# Altium PCB walle-eye-stereo.PcbDoc (part 2 of 2)
Units mil, origin at the board's own origin, x right, y up, seen from the top; angles counter-clockwise.
Board outline 1865.45 x 699.12 mil, 4 copper layers (Top Layer, SIG1, SIG2, Bottom Layer), stack 23.756 mil thick; 36 components, 55 nets, 245 pads, 155 vias.
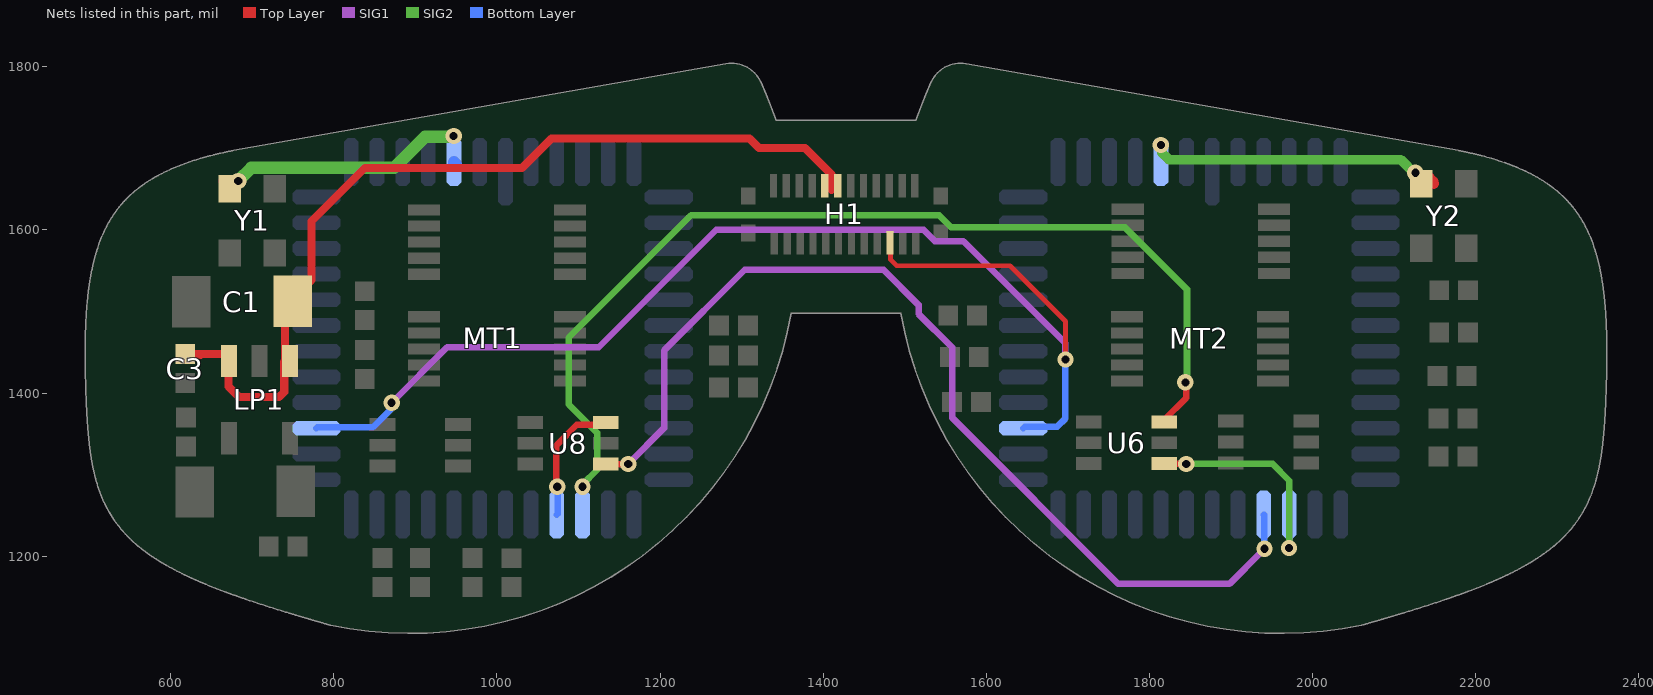
[diagram p4: the nets of this part, all layers, seen from the top]

## Via types
v1: diameter 20, hole 10, Top Layer to Bottom Layer, 110 vias
v2: diameter 18, hole 8, Top Layer to Bottom Layer, 45 vias

## Nets (pads, with @x,y where several pads share a name; then routed paths per layer and width w, separated by ;. In a path a pad name is that pad's centre, name@x,y a point inside that pad or via, vN(x,y) a via of type N, cw(c..) or ccw(c..) an arc to the next point about the centre after c; other vN are vias at no path point) (continued)
STB: H1.10 MT1.33 MT2.33 | length 1529.1
  Top Layer w6: H1.10@1482.39,1578 1482.66,1577.72 1482.66,1563.34 1490.04,1555.96 1629.04,1555.96 1697,1488 v1(1697,1441)
  SIG1 w8: v1(871,1388) 939,1456 1125,1456 1269,1600 1523,1600 1537,1586 1572,1586 1697,1461 v1(1697,1441)
  Bottom Layer w8: MT1.33@778.73,1356.76 779.97,1358 848,1358 869,1379 v1@869,1381 ; MT2.33@1645.23,1356.76 1647.04,1358.58 1686.76,1358.58 1697,1368.82 v1(1697,1441)
STLN_OUT0: MT1.22 U8.6 | length 160.9
  Top Layer w8: v1@1073,1288 1073,1289 1073,1336 1098,1361 U8.6@1133.52,1361
  Bottom Layer w8: MT1.22@1073.47,1251 1074.77,1252.3 v1@1074.77,1292.53
  other v1: 1074,1285
STLN_OUT1: MT2.22 U8.4 | length 1238.5
  Top Layer w8: U8.4@1133.52,1309.82 U8.4@1133.7,1310 ; U8.4@1133.52,1312.82 1133.61,1312.91 1160.09,1312.91 v1@1161,1312
  SIG1 w8: v1(1161,1313) 1205,1357 1205,1452 1304,1551 1474.02,1551 1517,1508.02 1517,1497 1558,1456 1558,1369.87 1761.87,1166 1898,1166 1938,1206 v1@1942,1206
  Bottom Layer w8: MT2.22@1939.97,1251 1940.48,1250.48 v1@1940.48,1209
  other v1: 1941,1209
VIN_5V: C1.1 C3.2 H1.19 H1.20 LP1.1 LP1.3 | length 1132.3
  Top Layer w10: C3.2@613,1447 613.27,1446.73 636.54,1446.73 636.54,1447 ; C3.2@618,1447.72 666.54,1447.72 669,1445.26 LP1.3@669,1445 ; LP1.3@671,1424 671,1408 684,1395 733,1395 739.38,1401.38 739.38,1438.27 740.18,1439.07 740.18,1497.82 C1.1@734,1504 ; C1.1@736.53,1512.55 C1.1@741.98,1518 ; 1410,1649 1411,1650 1411,1667 1377.78,1700.22 1321.38,1700.22 1309.6,1712 1067,1712 1031,1676 838,1676 772.55,1610.55 772.55,1538.55 752,1518 C1.1@751.85,1518 ; C1.1@741.98,1518 C1.1@751.85,1518 ; C1.1@741.98,1518 742.98,1519 742.98,1526.87 C1.1@751.85,1518
VSYNC0: MT1.21 U6.6 | length 1239.3
  Top Layer w8: U6.6@1818.26,1364.59 1818.26,1367.26 1845,1394 v1@1845,1413
  SIG2 w8: v1@1105,1288 1123,1306 1123,1351 1088,1386 1088,1468 1238,1618 1542,1618 1557,1603 1770,1603 1846,1527 v1@1846,1412 ; v1@1839,1413 v1(1844,1413)
  other v1: 1105,1285
VSYNC1: MT2.21 U6.4 | length 282.4
  Top Layer w8: U6.4@1823,1314 1823.8,1313.2 1844.8,1313.2 v1(1845,1313)
  SIG2 w8: v1@1849,1315 1849,1314.54 1850.54,1313 1950.99,1313 1971.46,1292.53 1971.46,1210.54 v1@1973,1209
  Bottom Layer w8: MT2.21@1971.46,1251 1971.23,1250.77 1971.23,1209.77 v1@1973,1208
  other v1: 1971,1210
XCLK0: MT1.47 Y1.3 | length 304.4
  Top Layer w15: Y1.3@666.07,1660 v1(683,1660)
  SIG2 w15: v1@684,1661 699,1676 874,1676 912,1714 v1@946,1714
  Bottom Layer w15: MT1.47@947.49,1683 MT1.47@950,1680.49
  other v1: 947,1715
XCLK1: MT2.47 Y2.3 | length 363.2
  Top Layer w12: Y2.3@2125,1671 2127.16,1671 2131.06,1667.1 2140.66,1667.1 2148.44,1659.32 2148.44,1656.37 2149,1656.93
  SIG2 w12: v1(1814,1704) 1815.78,1702.22 v1@1815.78,1695.78 ; v1@1815,1695 1824,1686 2108,1686 v1@2126,1668
  other v1: 2126,1670
pads on no net: H1. MT1.2 MT1.3 MT1.4 MT1.5 MT1.27 MT1.36 MT1.37 MT1.44 MT1.45 MT2.2 MT2.3 MT2.4 MT2.5 MT2.27 MT2.36 MT2.37 MT2.44 MT2.45 Y1.1 Y2.1

## Polygon pours and split planes (outlines as drawn)
GND-SEN on Top Layer "Top Layer-GND-SEN" (solid, remove dead copper, pour order 0): 422,1906 443,1885 2416,1885 2416,1027 2406,1017 2389,1034 395,1034
no net on Top Layer "Top Layer-No Net" (solid, pour order 2): 703,885
GND-SEN on Bottom Layer "Bottom Layer-GND-SEN" (solid, remove dead copper, pour order 4): 422,1876 2417,1876 2437,1856 2425,1844 2425,1039 426,1039 422,1043

## Keep-outs
Keep-Out Layer:
  circle w5: c2313.8,1458.67 r23.62
  circle w5: c542.15,1458.67 r23.62
  lines w5: 495.27,1441.79 495.28,1440.93 495.29,1440.07 495.29,1439.21 495.3,1438.35 495.31,1437.5 495.32,1436.64 495.33,1435.78 495.34,1434.92 495.35,1434.07 495.36,1433.21 495.37,1432.35 495.38,1431.49 495.4,1430.63 495.41,1429.78 495.42,1428.92 495.44,1428.06 495.45,1427.2 495.47,1426.34 495.49,1425.49 495.5,1424.63 495.52,1423.77 495.54,1422.91 495.55,1422.06 495.57,1421.2 495.59,1420.34 495.65,1417.77 495.69,1416.05 495.74,1414.34 495.78,1412.62 495.83,1410.9 495.9,1408.33 495.98,1405.76 496.06,1403.19 496.15,1400.61 496.24,1398.04 496.34,1395.47 496.44,1392.9 496.51,1391.18 496.55,1390.33 496.58,1389.47 496.62,1388.61 496.66,1387.75 496.69,1386.9 496.73,1386.04 496.77,1385.18 496.81,1384.33 496.85,1383.47 496.89,1382.61 496.93,1381.76 496.98,1380.9 497.02,1380.04 497.06,1379.18 497.11,1378.33 497.15,1377.47 497.2,1376.61 497.24,1375.76 497.29,1374.9 497.34,1374.04 497.39,1373.19 497.44,1372.33 497.49,1371.47 497.54,1370.62 497.59,1369.76 497.65,1368.91 497.7,1368.05 497.76,1367.19 497.81,1366.34 497.87,1365.48 497.93,1364.62 497.99,1363.77 498.05,1362.91 498.11,1362.06 498.17,1361.2 498.23,1360.35 498.3,1359.49 498.36,1358.63 498.43,1357.78 498.5,1356.92 498.56,1356.07 498.63,1355.21 498.71,1354.36 498.78,1353.5 498.85,1352.65 498.93,1351.79 499,1350.94 499.08,1350.08 499.16,1349.23 499.23,1348.37 499.32,1347.52 499.4,1346.67 499.48,1345.81 499.57,1344.96 499.65,1344.1 499.74,1343.25 499.83,1342.4 499.92,1341.54 500.01,1340.69 500.1,1339.84 500.2,1338.99 500.29,1338.13 500.39,1337.28 500.49,1336.43 500.59,1335.58 500.69,1334.72 500.79,1333.87 500.9,1333.02 501,1332.17 501.11,1331.32 501.22,1330.47 501.34,1329.62 501.45,1328.76 501.57,1327.91 501.68,1327.06 501.8,1326.21 501.93,1325.37 502.05,1324.52 502.18,1323.67 502.3,1322.82 502.43,1321.97 502.57,1321.12 502.7,1320.28 502.84,1319.43 502.98,1318.58 503.12,1317.74 503.27,1316.89 503.41,1316.04 503.56,1315.2 503.71,1314.35 503.87,1313.51 504.03,1312.67 504.19,1311.82 504.35,1310.98 504.51,1310.14 504.68,1309.3 504.85,1308.46 505.03,1307.61 505.2,1306.77 505.38,1305.93 505.57,1305.1 505.75,1304.26 505.94,1303.42 506.13,1302.58 506.33,1301.75 506.53,1300.91 506.73,1300.08 506.93,1299.24 507.14,1298.41 507.35,1297.58 507.56,1296.75 507.78,1295.92 508,1295.09 508.22,1294.26 508.45,1293.43 508.91,1291.78 509.39,1290.13 509.88,1288.48 510.39,1286.84 510.91,1285.2 511.45,1283.57 512,1281.94 512.56,1280.32 513.14,1278.71 513.74,1277.1 514.35,1275.49 514.98,1273.89 515.63,1272.3 516.29,1270.72 516.97,1269.14 517.66,1267.57 518.38,1266.01 519.11,1264.45 519.86,1262.91 ccw(c652.42,1327.98) 530.2,1245.09 ccw(c651.5,1327.36) 536.28,1236.77 537.89,1234.76 539.54,1232.77 541.22,1230.82 542.93,1228.89 544.67,1226.99 546.44,1225.12 548.24,1223.28 550.08,1221.46 551.94,1219.68 553.19,1218.51 554.46,1217.35 555.74,1216.2 557.03,1215.07 557.67,1214.51 558.33,1213.95 558.98,1213.39 559.64,1212.84 560.3,1212.29 560.96,1211.74 561.62,1211.2 562.29,1210.66 562.96,1210.12 563.63,1209.58 564.3,1209.05 564.98,1208.52 565.66,1208 566.34,1207.47 567.02,1206.95 567.71,1206.44 568.39,1205.92 569.08,1205.41 569.77,1204.9 570.47,1204.39 571.16,1203.89 571.86,1203.39 573.26,1202.39 574.67,1201.41 576.08,1200.43 577.5,1199.47 578.93,1198.52 580.36,1197.57 581.08,1197.1 581.8,1196.64 582.52,1196.18 583.25,1195.71 583.97,1195.26 584.7,1194.8 585.43,1194.34 586.16,1193.89 586.89,1193.44 587.62,1193 588.36,1192.55 589.09,1192.11 589.83,1191.67 590.57,1191.23 591.31,1190.79 592.05,1190.36 592.79,1189.93 593.53,1189.5 594.27,1189.07 595.02,1188.64 595.77,1188.22 597.26,1187.38 598.76,1186.54 600.27,1185.72 601.78,1184.9 603.29,1184.09 604.8,1183.28 606.33,1182.49 607.85,1181.7 609.38,1180.92 610.91,1180.14 612.45,1179.37 613.98,1178.61 614.75,1178.23 615.53,1177.86 616.3,1177.48 617.07,1177.11 617.84,1176.74 618.62,1176.37 619.39,1176 620.17,1175.63 620.95,1175.26 621.73,1174.9 622.5,1174.54 623.28,1174.18 624.06,1173.82 624.84,1173.46 625.62,1173.1 626.41,1172.75 627.19,1172.39 627.97,1172.04 628.75,1171.69 629.54,1171.34 630.32,1170.99 631.11,1170.64 631.9,1170.3 632.68,1169.95 633.47,1169.61 634.26,1169.27 635.05,1168.93 635.83,1168.59 636.62,1168.25 637.41,1167.91 638.2,1167.58 639,1167.24 639.79,1166.91 640.58,1166.58 641.37,1166.25 642.16,1165.92 642.96,1165.59 643.75,1165.26 645.34,1164.61 646.93,1163.96 648.52,1163.31 650.11,1162.67 651.71,1162.04 653.3,1161.41 654.9,1160.78 656.5,1160.15 658.1,1159.53 659.7,1158.92 661.3,1158.3 662.91,1157.69 664.51,1157.09 666.12,1156.49 666.92,1156.19 667.73,1155.89 668.53,1155.59 669.34,1155.29 670.14,1154.99 670.95,1154.7 671.75,1154.4 672.56,1154.11 673.37,1153.82 674.17,1153.52 674.98,1153.23 675.79,1152.94 676.59,1152.65 677.4,1152.36 678.21,1152.07 679.02,1151.78 679.83,1151.49 680.63,1151.21 681.44,1150.92 682.25,1150.63 683.06,1150.35 683.87,1150.06 684.68,1149.78 685.49,1149.5 686.3,1149.22 687.11,1148.93 687.92,1148.65 688.73,1148.37 689.54,1148.09 690.35,1147.81 691.17,1147.53 691.98,1147.26 692.79,1146.98 693.6,1146.7 695.23,1146.15 696.85,1145.6 698.48,1145.05 700.1,1144.51 701.73,1143.96 703.36,1143.42 704.99,1142.88 706.62,1142.34 708.25,1141.81 709.88,1141.27 711.51,1140.74 713.14,1140.21 714.78,1139.69 716.41,1139.16 718.04,1138.63 719.68,1138.11 721.31,1137.59 722.95,1137.07 724.59,1136.56 726.22,1136.04 727.86,1135.53 729.5,1135.02 731.14,1134.51 732.78,1134 734.41,1133.49 736.05,1132.98 737.69,1132.48 739.34,1131.98 740.98,1131.48 742.62,1130.98 744.26,1130.48 745.08,1130.23 745.9,1129.98 746.72,1129.73 747.55,1129.49 748.37,1129.24 749.19,1128.99 750.01,1128.74 750.83,1128.5 751.65,1128.25 752.48,1128.01 753.3,1127.76 754.12,1127.52 754.94,1127.27 755.77,1127.03 756.59,1126.78 757.41,1126.54 758.23,1126.29 759.06,1126.05 759.88,1125.81 760.7,1125.56 761.52,1125.32 762.35,1125.08 763.17,1124.84 763.99,1124.59 764.82,1124.35 765.64,1124.11 766.46,1123.87 767.29,1123.63 768.11,1123.39 768.93,1123.15 769.76,1122.9 770.58,1122.66 771.4,1122.42 772.23,1122.18 773.05,1121.94 773.87,1121.7 774.7,1121.46 775.52,1121.22 776.35,1120.98 777.17,1120.74 777.99,1120.51 778.82,1120.27 779.64,1120.03 780.47,1119.79 781.29,1119.55 782.11,1119.31 782.94,1119.07 783.76,1118.83 784.59,1118.6 785.41,1118.36 786.23,1118.12 787.06,1117.88 787.88,1117.64 788.71,1117.4 789.53,1117.17 790.36,1116.93 791.18,1116.69 792,1116.45 792.83,1116.21 793.65,1115.98 794.48,1115.74 795.3,1115.5 796.13,1115.26 ccw(c893.14,1580.21) 1360.93,1498.04 1495.02,1498.04 ccw(c1962.82,1580.21) 2059.83,1115.26 2061.48,1115.74 2062.3,1115.98 2063.12,1116.21 2063.95,1116.45 2064.77,1116.69 2065.6,1116.93 2066.42,1117.17 2067.25,1117.4 2068.07,1117.64 2068.89,1117.88 2069.72,1118.12 2070.54,1118.36 2071.37,1118.59 2072.19,1118.83 2073.01,1119.07 2073.84,1119.31 2074.66,1119.55 2075.49,1119.79 2076.31,1120.03 2077.13,1120.27 2077.96,1120.5 2078.78,1120.74 2079.6,1120.98 2080.43,1121.22 2081.25,1121.46 2082.08,1121.7 2082.9,1121.94 2083.72,1122.18 2084.55,1122.42 2085.37,1122.66 2086.19,1122.9 2087.02,1123.14 2087.84,1123.38 2088.66,1123.63 2089.49,1123.87 2090.31,1124.11 2091.13,1124.35 2091.96,1124.59 2092.78,1124.83 2093.6,1125.08 2094.42,1125.32 2095.25,1125.56 2096.07,1125.81 2096.89,1126.05 2097.71,1126.29 2098.54,1126.54 2099.36,1126.78 2100.18,1127.02 2101,1127.27 2101.83,1127.51 2102.65,1127.76 2103.47,1128 2104.29,1128.25 2105.11,1128.5 2105.93,1128.74 2106.76,1128.99 2107.58,1129.24 2108.4,1129.48 2109.22,1129.73 2110.04,1129.98 2110.86,1130.23 2111.68,1130.48 2112.51,1130.72 2114.15,1131.22 2115.79,1131.72 2117.43,1132.22 2119.07,1132.73 2120.71,1133.23 2122.35,1133.74 2123.99,1134.25 2125.62,1134.76 2127.26,1135.27 2128.9,1135.78 2130.54,1136.29 2132.17,1136.81 2133.81,1137.33 2135.44,1137.85 2137.08,1138.37 2138.71,1138.89 2140.35,1139.42 2141.98,1139.94 2143.61,1140.47 2145.24,1141 2146.87,1141.54 2148.5,1142.07 2150.13,1142.61 2151.76,1143.14 2153.39,1143.69 2155.02,1144.23 2156.65,1144.77 2158.27,1145.32 2159.9,1145.87 2161.52,1146.42 2163.15,1146.97 2163.96,1147.25 2164.77,1147.53 2165.58,1147.81 2166.39,1148.09 2167.2,1148.37 2168.01,1148.65 2168.82,1148.93 2169.63,1149.21 2170.44,1149.49 2171.25,1149.77 2172.06,1150.06 2172.87,1150.34 2173.68,1150.63 2174.49,1150.91 2175.3,1151.2 2176.11,1151.49 2176.92,1151.77 2177.72,1152.06 2178.53,1152.35 2179.34,1152.64 2180.15,1152.93 2180.95,1153.22 2181.76,1153.51 2182.57,1153.81 2183.37,1154.1 2184.18,1154.39 2184.98,1154.69 2185.79,1154.99 2186.59,1155.28 2187.4,1155.58 2188.2,1155.88 2189.01,1156.18 2189.81,1156.48 2190.61,1156.78 2191.42,1157.08 2193.02,1157.69 2194.63,1158.3 2196.23,1158.91 2197.83,1159.52 2199.43,1160.14 2201.03,1160.77 2202.63,1161.4 2204.22,1162.03 2205.82,1162.66 2207.41,1163.3 2209,1163.95 2210.59,1164.6 2212.18,1165.25 2212.97,1165.58 2213.76,1165.9 2214.56,1166.23 2215.35,1166.57 2216.14,1166.9 2216.93,1167.23 2217.72,1167.57 2218.51,1167.9 2219.3,1168.24 2220.09,1168.58 2220.88,1168.92 2221.67,1169.26 2222.46,1169.6 2223.24,1169.94 2224.03,1170.29 2224.82,1170.63 2225.6,1170.98 2226.39,1171.33 2227.17,1171.68 2227.95,1172.03 2228.74,1172.38 2229.52,1172.73 2230.3,1173.09 2231.08,1173.45 2231.86,1173.8 2232.64,1174.16 2233.42,1174.52 2234.2,1174.89 2234.98,1175.25 2235.75,1175.62 2236.53,1175.98 2237.3,1176.35 2238.08,1176.72 2238.85,1177.09 2239.62,1177.47 2240.4,1177.84 2241.17,1178.22 2241.94,1178.6 2242.71,1178.98 2244.24,1179.74 2245.78,1180.51 2247.31,1181.29 2248.83,1182.07 2250.36,1182.87 2251.87,1183.67 2253.39,1184.47 2254.9,1185.29 2256.41,1186.11 2257.91,1186.94 2259.41,1187.78 2260.9,1188.62 2261.64,1189.05 2262.39,1189.48 2263.13,1189.91 2263.87,1190.34 2264.61,1190.77 2265.35,1191.21 2266.09,1191.65 2266.83,1192.09 2267.56,1192.53 2268.3,1192.97 2269.03,1193.42 2269.76,1193.87 2270.49,1194.32 2271.22,1194.78 2271.94,1195.23 2272.67,1195.69 2273.39,1196.15 2274.12,1196.62 2274.84,1197.08 2275.56,1197.55 2276.27,1198.02 2277.7,1198.97 2279.13,1199.93 2280.55,1200.89 2281.96,1201.87 2283.36,1202.86 2284.76,1203.86 2285.45,1204.37 2286.14,1204.87 2286.83,1205.38 2287.52,1205.89 2288.21,1206.41 2288.9,1206.93 2289.58,1207.45 2290.26,1207.97 2290.94,1208.49 2291.61,1209.02 2292.29,1209.56 2292.96,1210.09 2293.63,1210.63 2294.3,1211.17 2294.96,1211.71 2295.62,1212.26 2296.28,1212.81 2296.94,1213.36 2297.59,1213.92 2298.24,1214.47 2298.89,1215.04 2299.54,1215.6 2300.82,1216.74 2302.1,1217.89 2303.36,1219.06 2304.61,1220.24 2306.46,1222.03 2308.28,1223.85 2310.07,1225.7 2311.83,1227.58 2313.57,1229.49 2315.27,1231.43 2316.93,1233.39 2318.57,1235.38 2320.17,1237.4 ccw(c2204.05,1327.67) 2321.73,1239.45 ccw(c2204,1327.69) 2330.77,1253.03 ccw(c2203.53,1327.98) 2336.45,1263.62 2337.19,1265.17 2337.91,1266.73 2338.62,1268.3 2339.3,1269.87 2339.97,1271.45 2340.63,1273.04 2341.27,1274.64 2341.89,1276.24 2342.5,1277.85 2343.09,1279.47 2343.66,1281.09 2344.22,1282.72 2344.76,1284.35 2345.29,1285.99 2345.81,1287.63 2346.31,1289.28 2346.8,1290.93 2347.03,1291.76 2347.27,1292.59 2347.5,1293.42 2347.73,1294.25 2347.95,1295.09 2348.17,1295.92 2348.39,1296.75 2348.61,1297.59 2348.82,1298.42 2349.03,1299.26 2349.23,1300.1 2349.43,1300.93 2349.63,1301.77 2349.83,1302.61 2350.02,1303.45 2350.21,1304.29 2350.39,1305.13 2350.58,1305.98 2350.76,1306.82 2350.94,1307.66 2351.11,1308.5 2351.28,1309.35 2351.45,1310.19 2351.62,1311.04 2351.78,1311.88 2351.94,1312.73 2352.1,1313.57 2352.25,1314.42 2352.4,1315.26 2352.55,1316.11 2352.7,1316.95 2352.85,1317.8 2352.99,1318.65 2353.13,1319.5 2353.26,1320.34 2353.4,1321.19 2353.53,1322.04 2353.66,1322.89 2353.79,1323.73 2353.92,1324.58 2354.04,1325.43 2354.16,1326.28 2354.28,1327.13 2354.4,1327.98 2354.51,1328.83 2354.63,1329.68 2354.74,1330.53 2354.85,1331.38 2354.96,1332.23 2355.06,1333.08 2355.17,1333.93 2355.27,1334.78 2355.37,1335.63 2355.47,1336.48 2355.57,1337.34 2355.67,1338.19 2355.76,1339.04 2355.86,1339.89 2355.95,1340.75 2356.04,1341.6 2356.13,1342.45 2356.22,1343.3 2356.31,1344.16 2356.39,1345.01 2356.48,1345.86 2356.56,1346.72 2356.64,1347.57 2356.72,1348.43 2356.8,1349.28 2356.88,1350.13 2356.96,1350.99 2357.03,1351.84 2357.11,1352.7 2357.18,1353.55 2357.25,1354.41 2357.32,1355.26 2357.39,1356.12 2357.46,1356.97 2357.53,1357.83 2357.6,1358.69 2357.66,1359.54 2357.72,1360.4 2357.79,1361.25 2357.85,1362.11 2357.91,1362.96 2357.97,1363.82 2358.03,1364.68 2358.09,1365.53 2358.14,1366.39 2358.2,1367.24 2358.26,1368.1 2358.31,1368.96 2358.36,1369.81 2358.42,1370.67 2358.47,1371.53 2358.52,1372.38 2358.57,1373.24 2358.62,1374.09 2358.67,1374.95 2358.71,1375.81 2358.76,1376.66 2358.81,1377.52 2358.85,1378.38 2358.89,1379.23 2358.94,1380.09 2358.98,1380.95 2359.02,1381.8 2359.07,1382.66 2359.11,1383.52 2359.15,1384.37 2359.19,1385.23 2359.22,1386.09 2359.26,1386.95 2359.3,1387.8 2359.34,1388.66 2359.37,1389.52 2359.41,1390.37 2359.45,1391.23 2359.55,1393.8 2359.65,1396.37 2359.74,1398.94 2359.83,1401.52 2359.92,1404.09 2360,1406.66 2360.08,1409.23 2360.15,1411.81 2360.2,1413.52 2360.24,1415.24 2360.28,1416.95 2360.32,1418.67 2360.38,1421.24 2360.4,1422.1 2360.42,1422.95 2360.44,1423.81 2360.45,1424.67 2360.47,1425.53 2360.49,1426.38 2360.5,1427.24 2360.52,1428.1 2360.53,1428.96 2360.54,1429.82 2360.56,1430.67 2360.57,1431.53 2360.58,1432.39 2360.6,1433.25 2360.61,1434.1 2360.62,1434.96 2360.63,1435.82 2360.64,1436.68 2360.65,1437.54 2360.65,1438.39 2360.66,1439.25 2360.67,1440.11 2360.68,1440.97 2360.68,1441.82 2360.69,1442.68 2360.69,1443.54 2360.7,1444.4 2360.7,1445.26 2360.7,1446.11 2360.7,1446.97 2360.7,1447.83 2360.7,1448.69 2360.7,1449.54 2360.7,1450.4 2360.7,1451.26 2360.7,1452.12 2360.7,1452.98 2360.69,1453.83 2360.69,1454.69 2360.68,1455.55 2360.68,1456.41 2360.67,1457.27 2360.66,1458.12 2360.65,1458.98 2360.64,1459.84 2360.63,1460.7 2360.61,1462.41 2360.58,1464.13 2360.55,1465.84 2360.52,1467.56 2360.48,1469.28 2360.44,1470.99 2360.4,1472.71 2360.35,1474.42 2360.32,1475.28 2360.3,1476.14 2360.27,1477 2360.24,1477.85 2360.21,1478.71 2360.18,1479.57 2360.15,1480.43 2360.12,1481.29 2360.08,1482.14 2360.05,1483 2360.01,1483.86 2359.98,1484.72 2359.94,1485.57 2359.9,1486.43 2359.86,1487.29 2359.82,1488.15 2359.77,1489 2359.73,1489.86 2359.68,1490.72 2359.64,1491.57 2359.59,1492.43 2359.54,1493.29 2359.49,1494.14 2359.44,1495 2359.39,1495.86 2359.33,1496.71 2359.28,1497.57 2359.22,1498.43 2359.16,1499.28 2359.1,1500.14 2359.04,1501 2358.98,1501.85 2358.91,1502.71 2358.85,1503.56 2358.78,1504.42 2358.64,1506.13 2358.5,1507.84 2358.35,1509.55 2358.19,1511.26 2358.03,1512.97 2357.86,1514.67 2357.68,1516.38 2357.5,1518.09 2357.31,1519.79 2357.12,1521.5 2356.91,1523.2 2356.7,1524.9 2356.49,1526.61 2356.26,1528.31 2356.14,1529.16 2356.03,1530.01 2355.91,1530.86 2355.79,1531.71 2355.66,1532.56 2355.54,1533.41 2355.41,1534.25 2355.28,1535.1 2355.15,1535.95 2355.02,1536.8 2354.88,1537.65 2354.75,1538.49 2354.61,1539.34 2354.47,1540.19 2354.32,1541.03 2354.18,1541.88 2354.03,1542.72 2353.88,1543.57 2353.72,1544.41 2353.57,1545.26 2353.41,1546.1 2353.09,1547.78 2352.76,1549.47 2352.42,1551.15 2352.06,1552.83 2351.7,1554.51 2351.33,1556.18 2351.14,1557.02 2350.95,1557.86 2350.75,1558.69 2350.56,1559.53 2350.35,1560.36 2350.15,1561.2 2349.94,1562.03 2349.74,1562.86 2349.52,1563.69 2349.31,1564.52 2349.09,1565.35 2348.87,1566.18 2348.65,1567.01 2348.42,1567.84 2348.19,1568.67 2347.96,1569.49 2347.72,1570.32 2347.48,1571.14 2347.24,1571.96 2346.99,1572.79 2346.74,1573.61 2346.49,1574.43 2346.24,1575.25 2345.98,1576.07 2345.71,1576.88 2345.45,1577.7 2344.91,1579.33 2344.35,1580.95 2343.78,1582.57 2343.2,1584.19 2342.6,1585.8 2341.98,1587.4 2341.35,1589 2340.71,1590.59 2340.05,1592.18 2339.37,1593.76 2338.68,1595.33 2337.98,1596.89 2337.26,1598.45 2336.52,1600 2335.76,1601.54 2334.99,1603.08 2334.2,1604.6 2333.4,1606.12 2332.16,1608.38 2331.31,1609.88 2330.44,1611.36 2329.56,1612.84 2328.66,1614.3 2327.75,1615.75 2326.81,1617.2 2325.86,1618.63 2324.89,1620.05 2323.91,1621.45 2322.91,1622.85 2321.89,1624.23 2320.85,1625.6 2319.79,1626.95 ccw(c2215.49,1544.63) 2317.63,1629.62 ccw(c2214.05,1543.43) 2315.96,1631.59 ccw(c2212.83,1542.38) 2314.26,1633.52 ccw(c2211.65,1541.32) 2312.52,1635.42 ccw(c2210.49,1540.24) 2310.74,1637.29 ccw(c2209.38,1539.16) 2308.93,1639.12 ccw(c2208.3,1538.08) 2307.09,1640.93 ccw(c2207.27,1537.01) 2305.22,1642.69 ccw(c2206.13,1535.78) 2302.67,1645 ccw(c2205.02,1534.51) 2300.72,1646.69 2299.41,1647.8 2298.08,1648.89 2296.75,1649.97 2295.4,1651.03 2294.03,1652.08 2292.66,1653.11 2291.28,1654.13 2289.88,1655.13 2288.48,1656.12 2287.07,1657.09 2285.64,1658.05 2284.21,1659 2282.76,1659.93 2281.31,1660.85 2279.85,1661.75 2278.38,1662.64 2276.91,1663.52 2275.42,1664.38 2273.93,1665.23 2272.43,1666.06 2270.92,1666.88 2269.41,1667.69 2267.89,1668.49 2266.36,1669.27 2264.83,1670.04 2263.29,1670.8 2261.74,1671.55 2260.97,1671.92 2260.19,1672.29 2259.41,1672.65 2258.63,1673.01 2257.07,1673.72 2255.51,1674.42 2253.94,1675.11 2252.36,1675.79 2251.57,1676.13 2250.78,1676.46 2249.99,1676.79 2249.2,1677.12 2248.4,1677.44 2247.61,1677.77 2246.81,1678.09 2246.01,1678.4 2245.21,1678.72 2244.42,1679.03 2243.62,1679.34 2242.81,1679.65 2242.01,1679.96 2241.21,1680.26 2240.41,1680.56 2239.6,1680.86 2238.8,1681.16 2237.99,1681.45 2237.18,1681.74 2236.37,1682.03 2235.57,1682.32 2234.76,1682.6 ccw(c2126.48,1374.02) 2224.99,1685.86 ccw(c2125.44,1370.74) 2213.47,1689.27 ccw(c2124.78,1368.38) 2207.67,1690.82 2206.84,1691.03 2206,1691.24 2205.17,1691.45 2204.34,1691.65 2203.51,1691.86 2202.67,1692.06 2201.84,1692.26 2201.01,1692.46 2200.17,1692.66 2199.34,1692.86 2198.5,1693.05 2197.67,1693.24 2196.83,1693.44 2195.99,1693.63 2195.16,1693.82 2194.32,1694 2193.48,1694.19 2192.64,1694.38 2191.81,1694.56 2190.97,1694.75 2190.13,1694.93 2189.29,1695.11 2188.45,1695.29 2187.62,1695.47 2186.78,1695.65 2185.94,1695.83 2185.1,1696.01 2184.26,1696.19 2183.42,1696.37 2182.58,1696.55 2181.74,1696.72 2180.9,1696.9 2180.06,1697.08 2179.22,1697.25 2178.38,1697.43 1575.22,1803.78 ccw(c1568.38,1765.01) 1532.73,1781.72 ccw(c1962.82,1580.21) 1513.54,1734.26 1342.41,1734.26 ccw(c893.14,1580.21) 1323.23,1781.72 ccw(c1287.57,1765.01) 1280.74,1803.78 677.57,1697.43 675.89,1697.09 675.05,1696.92 674.21,1696.75 673.37,1696.58 672.53,1696.41 671.69,1696.24 670.85,1696.07 670.01,1695.89 669.17,1695.72 668.33,1695.54 667.49,1695.37 666.65,1695.19 665.81,1695.01 664.97,1694.83 664.13,1694.64 661.62,1694.08 659.95,1693.7 659.11,1693.5 658.28,1693.31 657.44,1693.11 656.61,1692.91 655.77,1692.71 654.94,1692.5 654.11,1692.3 653.27,1692.09 652.44,1691.88 651.61,1691.67 649.12,1691.03 648.29,1690.82 647.46,1690.6 646.63,1690.38 645.8,1690.16 644.97,1689.93 644.14,1689.71 643.31,1689.48 642.49,1689.25 641.66,1689.02 640.84,1688.79 640.01,1688.55 639.19,1688.32 638.36,1688.08 636.71,1687.6 635.07,1687.1 633.43,1686.61 631.79,1686.1 630.15,1685.58 628.52,1685.06 626.89,1684.53 625.26,1683.99 623.63,1683.44 622.01,1682.88 620.39,1682.32 618.77,1681.74 617.16,1681.16 615.55,1680.56 613.94,1679.96 612.34,1679.35 610.74,1678.72 609.15,1678.09 607.55,1677.45 605.97,1676.79 604.39,1676.13 602.81,1675.45 601.23,1674.77 599.67,1674.07 598.1,1673.37 596.54,1672.65 594.99,1671.92 593.44,1671.18 591.9,1670.42 590.37,1669.66 588.84,1668.88 587.31,1668.09 585.79,1667.29 585.04,1666.88 584.28,1666.47 583.53,1666.06 582.78,1665.65 582.03,1665.23 581.29,1664.8 580.54,1664.38 579.8,1663.95 579.06,1663.52 578.32,1663.08 577.58,1662.64 576.11,1661.76 574.65,1660.85 573.2,1659.94 571.75,1659.01 570.32,1658.06 568.89,1657.1 567.48,1656.13 566.08,1655.14 564.68,1654.13 563.3,1653.11 561.92,1652.08 560.56,1651.03 559.21,1649.97 557.87,1648.89 556.55,1647.8 555.23,1646.69 553.93,1645.57 ccw(c650.27,1535.29) 551.37,1643.28 ccw(c649.13,1536.53) 549.49,1641.52 ccw(c648.1,1537.62) 547.63,1639.73 ccw(c647.02,1538.72) 545.81,1637.9 ccw(c645.91,1539.81) 544.02,1636.05 ccw(c644.75,1540.9) 542.27,1634.16 ccw(c643.56,1541.98) 540.55,1632.23 ccw(c642.35,1543.04) 538.87,1630.28 ccw(c641.12,1544.08) 537.23,1628.29 ccw(c640.45,1544.63) 534.07,1624.23 533.05,1622.84 532.04,1621.45 531.06,1620.04 530.09,1618.62 529.14,1617.19 528.2,1615.75 527.29,1614.3 526.39,1612.83 525.51,1611.36 524.64,1609.87 523.79,1608.38 522.55,1606.12 521.75,1604.6 520.96,1603.07 520.19,1601.54 519.43,1599.99 518.7,1598.44 517.97,1596.89 517.27,1595.32 516.58,1593.75 515.9,1592.17 515.24,1590.58 514.6,1588.99 513.97,1587.39 513.35,1585.79 512.75,1584.18 512.17,1582.56 511.6,1580.94 511.04,1579.32 510.5,1577.69 509.97,1576.05 509.71,1575.23 509.46,1574.42 509.21,1573.6 508.96,1572.77 508.71,1571.95 508.47,1571.13 508.23,1570.3 507.99,1569.48 507.76,1568.65 507.53,1567.83 507.3,1567 507.08,1566.17 506.86,1565.34 506.64,1564.51 506.43,1563.68 506.21,1562.85 506.01,1562.01 505.8,1561.18 505.6,1560.35 505.4,1559.51 505.2,1558.68 505,1557.84 504.81,1557 504.62,1556.17 504.43,1555.33 504.07,1553.65 503.71,1551.97 503.36,1550.29 503.03,1548.61 502.7,1546.92 502.38,1545.24 502.23,1544.39 502.07,1543.55 501.92,1542.7 501.78,1541.86 501.63,1541.01 501.49,1540.17 501.34,1539.32 501.2,1538.47 501.07,1537.63 500.93,1536.78 500.8,1535.93 500.67,1535.08 500.54,1534.23 500.41,1533.39 500.29,1532.54 500.16,1531.69 500.04,1530.84 499.92,1529.99 499.81,1529.14 499.69,1528.29 499.58,1527.44 499.36,1525.73 499.14,1524.03 498.94,1522.33 498.74,1520.62 498.54,1518.92 498.36,1517.21 498.18,1515.5 498.01,1513.8 497.84,1512.09 497.68,1510.38 497.53,1508.67 497.38,1506.96 497.24,1505.25 497.11,1503.54 497.04,1502.68 496.98,1501.83 496.91,1500.97 496.85,1500.11 496.79,1499.26 496.73,1498.4 496.68,1497.54 496.62,1496.69 496.57,1495.83 496.51,1494.97 496.46,1494.12 496.41,1493.26 496.36,1492.4 496.32,1491.55 496.27,1490.69 496.22,1489.83 496.18,1488.97 496.14,1488.12 496.1,1487.26 496.06,1486.4 496.02,1485.54 495.98,1484.69 495.94,1483.83 495.9,1482.97 495.87,1482.11 495.84,1481.25 495.8,1480.4 495.77,1479.54 495.74,1478.68 495.71,1477.82 495.68,1476.97 495.66,1476.11 495.63,1475.25 495.6,1474.39 495.58,1473.53 495.53,1471.82 495.49,1470.1 495.45,1468.38 495.42,1466.67 495.39,1464.95 495.36,1463.24 495.33,1461.52 495.31,1459.8 495.3,1458.95 495.29,1458.09 495.29,1457.23 495.28,1456.37 495.27,1455.51 495.27,1454.66 495.26,1453.8 495.26,1452.94 495.26,1452.08 495.25,1451.22 495.25,1450.37 495.25,1449.51 ccw(c1522.91,1448.78) 495.25,1448.65 495.25,1447.79 495.25,1446.93 495.25,1446.08 495.26,1445.22 495.26,1444.36 495.26,1443.5 495.27,1442.64 495.27,1441.79

## Other copper
Top Layer:
  rectangle net GND-SEN: 1430,1636 1453,1664
  rectangle net VIN_5V: 1399,1637 1421,1663

## Silkscreen, mask and mechanical layers (free items; w line width, h text height)
Top Overlay:
  lines w0.5: 768.53,1240.16 1221.28,1240.16 ; 768.53,1240.16 768.53,1692.92 ; 768.53,1240.16 1221.28,1240.16 ; 768.53,1240.16 768.53,1692.92 ; 768.53,1240.16 1221.28,1240.16 ; 768.53,1240.16 768.53,1692.92 ; 768.53,1692.92 1221.28,1692.92 ; 768.53,1692.92 1221.28,1692.92 ; 768.53,1692.92 1221.28,1692.92 ; 1221.28,1240.16 1221.28,1692.92 ; 1221.28,1240.16 1221.28,1692.92 ; 1221.28,1240.16 1221.28,1692.92 ; 1634.67,1240.16 2087.43,1240.16 ; 1634.67,1240.16 1634.67,1692.92 ; 1634.67,1240.16 2087.43,1240.16 ; 1634.67,1240.16 1634.67,1692.92 ; 1634.67,1240.16 2087.43,1240.16 ; 1634.67,1240.16 1634.67,1692.92 ; 1634.67,1692.92 2087.43,1692.92 ; 1634.67,1692.92 2087.43,1692.92 ; 1634.67,1692.92 2087.43,1692.92 ; 2087.43,1240.16 2087.43,1692.92 ; 2087.43,1240.16 2087.43,1692.92 ; 2087.43,1240.16 2087.43,1692.92
  text "Walle-Stereo" at 1291,1689 h25
  text "Jinson-22.09.12" at 1750,1163 h25
Mechanical 1:
  drawing of 1412 lines, arcs and shapes, not listed